# EAGLE board Combined_cc2530+breakout (EAGLE 7.1.0)
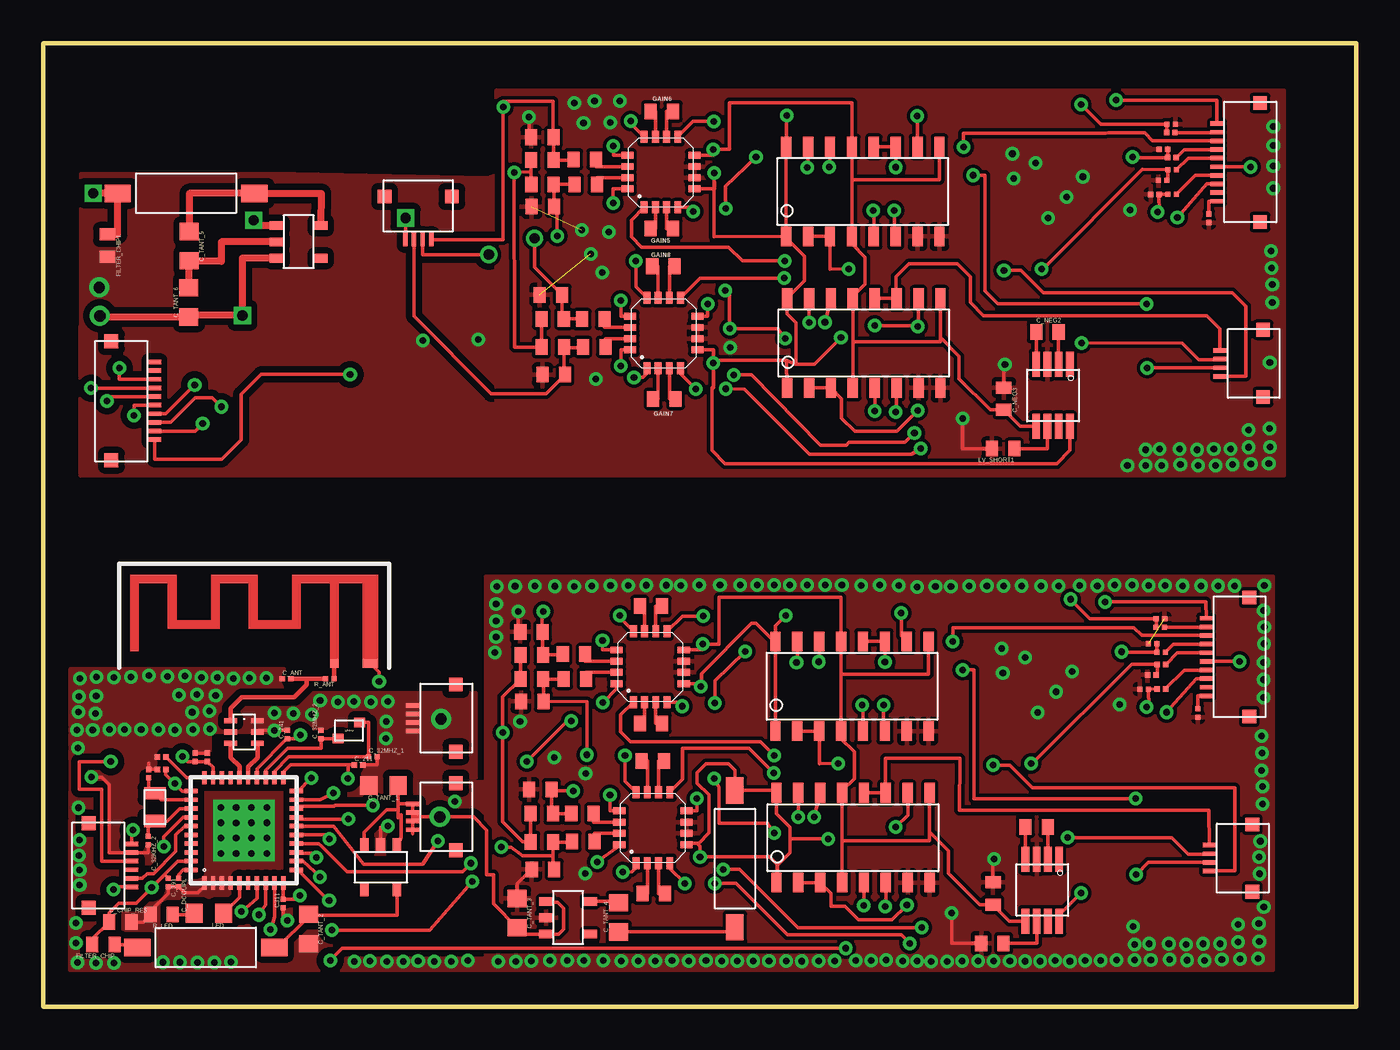
[diagram p0: board, top side]
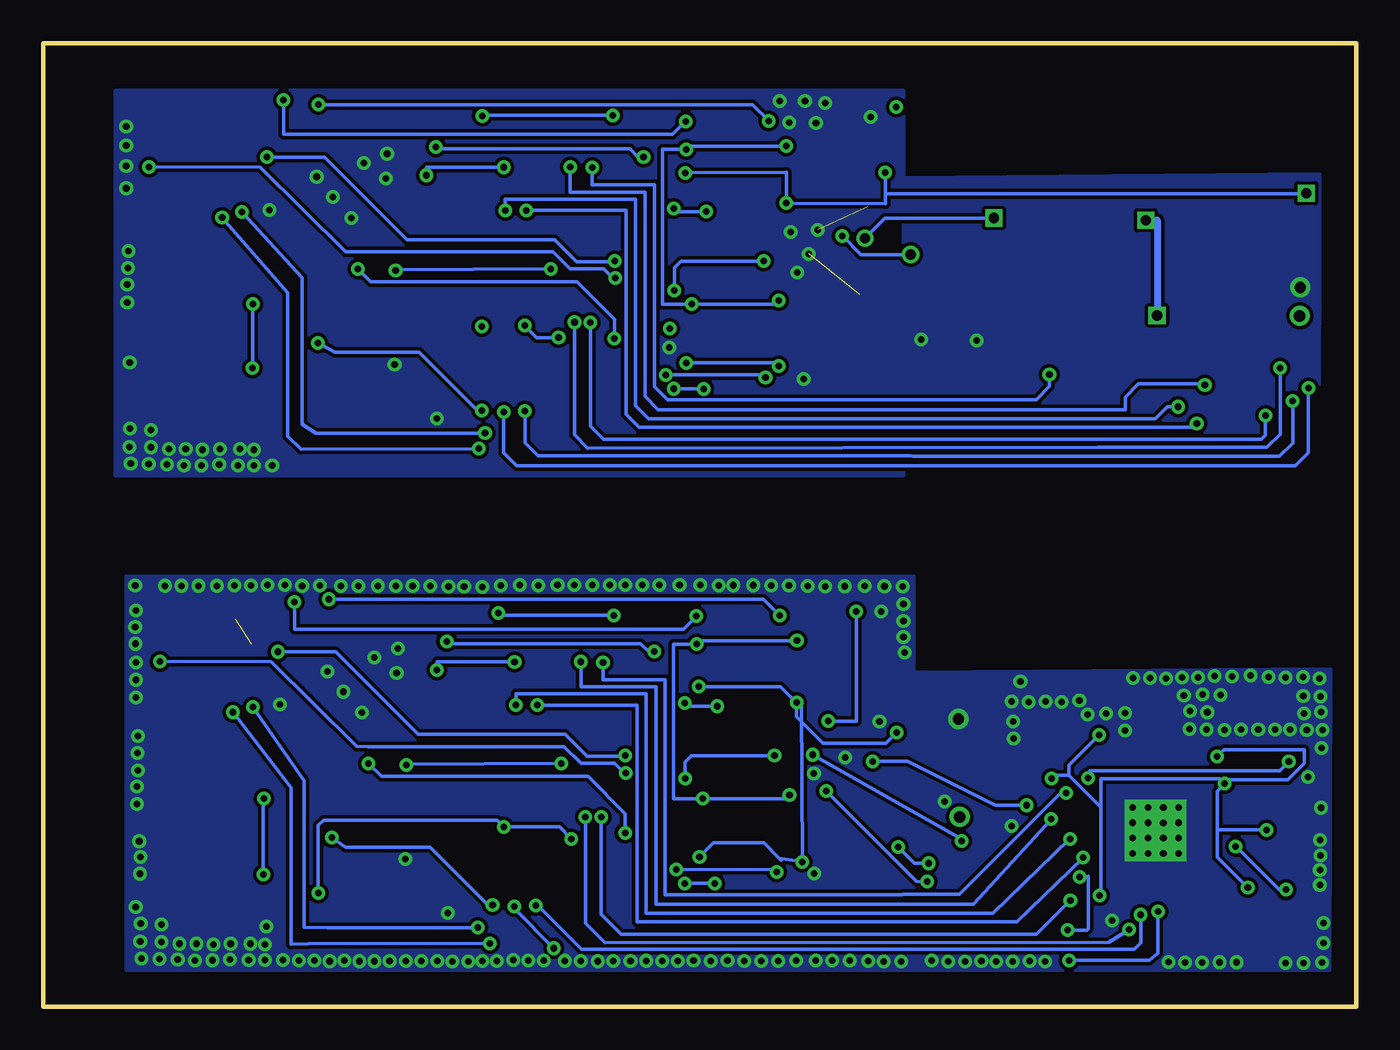
[diagram p1: board, bottom side, seen from below]

Size 76.2 x 55.88 mm. Coordinates in mm from the lower left corner, seen from the top.
Outline: 0,0 0,55.88 76.2,55.88 76.2,0 0,0
Copper layers (1*16): Top 0.035mm / dielectric 1.5mm / Bottom 0.035mm
Design rules "default": minimum track width 10mil, minimum drill 24mil, track to track 8mil, track to pad 8mil, pad to pad 8mil, via to via 8mil, smd to smd 8mil, copper to edge 40mil, drill to drill 8mil, minimum pad ring 10mil, minimum via ring 8mil, stop-mask expansion 4mil, vias tented up to drill 0mil, thermal gap 10mil

## Footprints (pad centres in the part's own frame; a part is rotated, then mirrored left to right if it is on the bottom)
X32.768KHZ = smd 1.25 x 0.7: Q1 0.009,-0.811; Q2 0.009,0.789
0201_R/L/C = smd 0.3 x 0.3: 1 -0.245,-0.001; 2 0.245,-0.001
0402_R/L/C = smd 0.7 x 0.9: 1 -0.65,0.001; 2 0.65,0.001
0603_R/L/C = smd 1 x 1.1: 1 -0.85,0; 2 0.85,0
FFC4POS = smd 0.762 x 0.254: 1 0.04,0.742; 2 0.04,0.242; 3 0.04,-0.258; 4 0.04,-0.758 | smd 0.8 x 0.8: P$5 -2.46,1.94; P$6 -2.46,-1.96
QFN-16 = smd 0.7 x 0.4: -IN1 -2.05,0.975; -IN2 2.05,0.975; IN1 -2.05,-0.975; IN2 2.05,-0.975; RG1 -2.05,0.325; RG1_1 -2.05,-0.325; RG2 2.05,0.325; RG2_1 2.05,-0.325 | smd 0.4 x 0.7: -VS 0.975,1.95; -VS_B 0.975,-1.95; OUT1 -0.325,1.95; OUT2 0.325,1.95; REF1 -0.325,-1.95; REF2 0.325,-1.95; VS -0.975,1.95; VS_B -0.975,-1.95
ANTENNA = smd 0.5 x 0.5: A 0,0 | smd 0.5 x 0.9: GND 0,-2.1
CC2530 = smd 0.762 x 0.254: AVDD1 3.048,1.27; AVDD2 3.048,0.762; AVDD3 3.048,-0.762; AVDD4 3.048,1.778; AVDD5 3.048,-2.286; DVDD2 -3.048,-2.286; GND1 -3.048,2.286; GND2 -3.048,1.778; GND3 -3.048,1.27; GND4 -3.048,0.762; P1_1 -3.048,-1.778; P1_2 -3.048,-1.27; P1_3 -3.048,-0.762; P1_4 -3.048,-0.254; P1_5 -3.048,0.254; RBIAS 3.048,2.286; RF_N 3.048,0.254; RF_P 3.048,-0.254; XOSC_Q1 3.048,-1.778; XOSC_Q2 3.048,-1.27 | smd 0.254 x 0.762: AVDD6 2.286,3.048; DCOUPL -2.286,3.048; DVDD1 -1.778,3.048; P0_0 1.778,-3.048; P0_1 1.27,-3.048; P0_2 0.762,-3.048; P0_3 0.254,-3.048; P0_4 -0.254,-3.048; P0_5 -0.762,-3.048; P0_6 -1.27,-3.048; P0_7 -1.778,-3.048; P1_0 -2.286,-3.048; P1_6 -1.27,3.048; P1_7 -0.762,3.048; P2_0 -0.254,3.048; P2_1 0.254,3.048; P2_2 0.762,3.048; P2_3/XOSC32K_Q2 1.27,3.048; P2_4/XOSC32K_Q1 1.778,3.048; RESET_N 2.286,-3.048 | smd 3.56 x 3.56: GND0 0,0 | drill 0.381 square: GND001 -1.335,1.335; GND002 -0.445,1.335; GND003 0.445,1.335; GND004 1.335,1.335; GND005 -1.335,0.445; GND006 -0.445,0.445; GND007 0.44,0.445; GND008 1.335,0.445; GND009 -1.335,-0.445; GND010 -0.445,-0.445; GND011 0.445,-0.445; GND012 1.335,-0.445; GND013 -1.335,-1.335; GND014 -0.445,-1.335; GND015 0.445,-1.335; GND016 1.335,-1.335
BALUN = smd 0.75 x 0.3: BALANCED3 -0.782,-0.655; BALANCED4 0.768,-0.655; GND2 -0.782,-0.005; GND5 0.768,-0.005; GND6 0.768,0.645; UNBALANCED -0.782,0.645
X32MHZ = smd 0.55 x 0.65: Q1 0.496,-0.576; Q2 -0.454,0.674
S-PDSO-G8 = smd 0.45 x 1.45: 1 -0.975,-1.8; 2 -0.325,-1.8; 3 0.325,-1.8; 4 0.975,-1.8; 5 0.975,1.8; 6 0.325,1.8; 7 -0.325,1.8; 8 -0.975,1.8
SOIC-16-ON-SEMI = smd 0.6 x 1.15: 1 -4.445,-2.6; 2 -3.175,-2.6; 3 -1.905,-2.6; 4 -0.635,-2.6; 5 0.635,-2.6; 6 1.905,-2.6; 7 3.175,-2.6; 8 4.445,-2.6; 9 4.445,2.6; 10 3.175,2.6; 11 1.905,2.6; 12 0.635,2.6; 13 -0.635,2.6; 14 -1.905,2.6; 15 -3.175,2.6; 16 -4.445,2.6
FFC10POS = smd 0.762 x 0.254: 1 -0.015,2.271; 2 -0.015,1.771; 3 -0.015,1.271; 4 -0.015,0.771; 5 -0.015,0.271; 6 -0.015,-0.229; 7 -0.015,-0.729; 8 -0.015,-1.229; 9 -0.015,-1.729; 10 -0.015,-2.229 | smd 0.8 x 0.8: P$11 -2.52,3.47; P$12 -2.52,-3.43
REGULATOR = smd 0.5 x 0.8: 1 0.94,1.275; 2 0,1.275; 3 -0.95,1.275; 4 -0.95,-1.275; 5 0.95,-1.275
SWITCH_MANUAL = smd 1.524 x 1.016: 1 -4.13,0; 2 3.81,0
FFC6POS = smd 0.762 x 0.254: 1 0.008,1.269; 2 0.008,0.769; 3 0.008,0.269; 4 0.008,-0.231; 5 0.008,-0.731; 6 0.008,-1.231 | smd 0.8 x 0.8: P$7 -2.49,2.47; P$8 -2.49,-2.43
DRILL_CONNECT = drill 0.66 pad 1.016: 1 0,0

## Placement (x,y rotation side)
32KHZ  X32.768KHZ  [X32.768KHZ]  6.5,11.55 180 top
C311  100nF  [0201_R/L/C]  13.93,5.98 90 top
C_32KHZ_1  15pF  [0201_R/L/C]  6.13,13.51 90 top
C_32KHZ_2  15pF  [0201_R/L/C]  6.11,9.63 270 top
C_32MHZ_1  20pF  [0201_R/L/C]  19.14,14.49 0 top
C_32MHZ_2  20pF  [0201_R/L/C]  16.12,15.78 90 top
C_101  100nF  [0201_R/L/C]  6.88,13.75 0 top
C_211  100nF  [0201_R/L/C]  18.31,14.01 0 top
C_241  100nF  [0201_R/L/C]  14.17,15.77 90 top
C_271  100nF  [0201_R/L/C]  9.53,14.46 270 top
C_272  220pF  [0201_R/L/C]  8.82,14.46 270 top
C_391  1uF  [0201_R/L/C]  7.25,7.2 270 top
C_ANT  0.5pF  [0201_R/L/C]  14.13,19 0 top
C_CHIP_RES  2.2uF  [0402_R/L/C]  4.48,4.9 0 top
C_DCOUPL  0.47uF  [0201_R/L/C]  7.86,7.2 270 top
C_NEG  10uF  [0402_R/L/C]  57.65,10.42 0 top
C_NEG1  10uF  [0402_R/L/C]  55.11,6.56 270 top
C_NEG2  10uF  [0402_R/L/C]  58.27,39.11 0 top
C_NEG3  10uF  [0402_R/L/C]  55.74,35.25 270 top
C_TANT_1  1uF  [0603_R/L/C]  19.75,12.82 180 top
C_TANT_2  2.2uF  [0603_R/L/C]  15.4,4.5 270 top
C_TANT_3  1uF  [0603_R/L/C]  27.51,5.42 270 top
C_TANT_4  2.2uF  [0603_R/L/C]  33.39,5.18 90 top
C_TANT_5  2.2uF  [0603_R/L/C]  8.49,44.11 270 top
C_TANT_6  1uF  [0603_R/L/C]  8.46,40.84 90 top
DC  0  [0402_R/L/C]  28.35,18.99 180 top
DC1  0  [0402_R/L/C]  28.35,20.4 180 top
DC2  0  [0402_R/L/C]  28.38,17.7 0 top
DC3  0  [0402_R/L/C]  28.34,21.73 0 top
DC4  0  [0402_R/L/C]  28.94,9.56 180 top
DC5  0  [0402_R/L/C]  29,7.96 0 top
DC6  0  [0402_R/L/C]  28.94,11.19 180 top
DC7  0  [0402_R/L/C]  28.84,12.59 0 top
DC8  0  [0402_R/L/C]  28.98,47.68 180 top
DC9  0  [0402_R/L/C]  29,46.39 0 top
DC10  0  [0402_R/L/C]  28.97,49.09 180 top
DC11  0  [0402_R/L/C]  28.96,50.42 0 top
DC12  0  [0402_R/L/C]  29.57,38.24 180 top
DC13  0  [0402_R/L/C]  29.63,36.65 0 top
DC14  0  [0402_R/L/C]  29.56,39.88 180 top
DC15  0  [0402_R/L/C]  29.46,41.28 0 top
DC_OFFSET1  10uF  [0402_R/L/C]  30.86,19 180 top
DC_OFFSET2  10uF  [0402_R/L/C]  30.8,20.44 180 top
DC_OFFSET3  10uF  [0402_R/L/C]  31.35,9.58 180 top
DC_OFFSET4  10uF  [0402_R/L/C]  31.3,11.19 180 top
DC_OFFSET5  10uF  [0402_R/L/C]  31.48,47.69 180 top
DC_OFFSET6  10uF  [0402_R/L/C]  31.43,49.13 180 top
DC_OFFSET7  10uF  [0402_R/L/C]  31.98,38.27 180 top
DC_OFFSET8  10uF  [0402_R/L/C]  31.92,39.88 180 top
FILTER_CHIP  L_1k  [0402_R/L/C]  3.51,3.59 180 top
FILTER_CHIP1  L_1k  [0402_R/L/C]  3.73,44.14 270 top
GAIN1  0  [0402_R/L/C]  35.27,16.43 180 top
GAIN2  0  [0402_R/L/C]  35.27,23.23 180 top
GAIN3  0  [0402_R/L/C]  35.43,6.55 180 top
GAIN4  0  [0402_R/L/C]  35.37,14.25 180 top
GAIN5  0  [0402_R/L/C]  35.9,45.12 180 top
GAIN6  0  [0402_R/L/C]  35.9,51.92 180 top
GAIN7  0  [0402_R/L/C]  36.05,35.24 180 top
GAIN8  0  [0402_R/L/C]  36,42.94 180 top
GND_IN  FFC4POS  [FFC4POS]  21.49,16.71 180 top
IC1  AD8222_NEW  [QFN-16]  35.22,19.71 90 top
IC2  AD8222_NEW  [QFN-16]  35.38,10.37 90 top
IC3  AD8222_NEW  [QFN-16]  35.85,48.4 90 top
IC4  AD8222_NEW  [QFN-16]  36.01,39.06 90 top
IN_CHOOSE  0  [0201_R/L/C]  64.88,19.84 180 top
IN_CHOOSE1  0  [0201_R/L/C]  64.88,18.42 180 top
IN_CHOOSE2  0  [0201_R/L/C]  64.8,22 180 top
IN_CHOOSE3  0  [0201_R/L/C]  64.87,20.55 180 top
IN_CHOOSE4  0  [0201_R/L/C]  64.33,19.24 0 top
IN_CHOOSE5  0  [0201_R/L/C]  63.88,18.41 180 top
IN_CHOOSE6  0  [0201_R/L/C]  64.82,22.49 0 top
IN_CHOOSE7  0  [0201_R/L/C]  64.37,21.04 180 top
IN_CHOOSE8  0  [0201_R/L/C]  65.51,48.53 180 top
IN_CHOOSE9  0  [0201_R/L/C]  67.01,17.03 270 top
IN_CHOOSE10  0  [0201_R/L/C]  65.51,47.11 180 top
IN_CHOOSE11  0  [0201_R/L/C]  65.43,50.69 180 top
IN_CHOOSE12  0  [0201_R/L/C]  65.49,49.24 180 top
IN_CHOOSE13  0  [0201_R/L/C]  64.95,47.92 0 top
IN_CHOOSE14  0  [0201_R/L/C]  64.51,47.1 180 top
IN_CHOOSE15  0  [0201_R/L/C]  65.45,51.18 0 top
IN_CHOOSE16  0  [0201_R/L/C]  65,49.73 180 top
IN_CHOOSE17  0  [0201_R/L/C]  67.63,45.72 270 top
INVERTED_F-ANTENNA  ANTENNA  [ANTENNA]  16.89,19.89 90 top
LED  [0603_R/L/C]  9.62,5.42 180 top
LV_SHORT  0  [0402_R/L/C]  55.08,3.67 180 top
LV_SHORT1  0  [0402_R/L/C]  55.7,32.36 180 top
R_ANT  0.0  [0201_R/L/C]  16.65,19 180 top
R_BIAS  56k  [0201_R/L/C]  6.88,14.48 180 top
R_LED  1k  [0402_R/L/C]  6.88,5.33 180 top
U$1  [CC2530]  11.65,10.21 90 top
U$2  BALUN  [BALUN]  11.67,15.93 0 top
U$3  X32MHZ  [X32MHZ]  17.8,15.99 90 top
U$4  TL7660  [S-PDSO-G8]  57.97,6.76 180 top
U$5  MC74HC4316A  [SOIC-16-ON-SEMI]  46.94,18.58 0 top
U$6  MC74HC4316A  [SOIC-16-ON-SEMI]  46.99,9.79 0 top
U$7  FFC10POS  [FFC10POS]  67.47,20.29 180 top
U$8  REGULATOR  [REGULATOR]  30.46,5.15 90 top
U$9  SWITCH_MANUAL  [SWITCH_MANUAL]  40.14,8.72 90 top
U$10  REGULATOR  [REGULATOR]  19.58,8.08 0 top
U$11  REGULATOR  [REGULATOR]  14.83,44.35 90 top
U$12  SWITCH_MANUAL  [SWITCH_MANUAL]  8.14,47.17 180 top
U$13  TL7660  [S-PDSO-G8]  58.6,35.45 180 top
U$14  MC74HC4316A  [SOIC-16-ON-SEMI]  47.56,47.27 0 top
U$15  MC74HC4316A  [SOIC-16-ON-SEMI]  47.62,38.48 0 top
U$16  FFC4POS  [FFC4POS]  68.33,37.29 180 top
U$17  FFC6POS  [FFC6POS]  5.14,8.17 0 top
U$18  SWITCH_MANUAL  [SWITCH_MANUAL]  9.29,3.43 180 top
U$19  FFC10POS  [FFC10POS]  68.09,48.98 180 top
U$20  FFC10POS  [FFC10POS]  6.48,35.11 0 top
U$21  FFC4POS  [FFC4POS]  21.78,44.53 270 top
U$28  FFC4POS  [FFC4POS]  67.7,8.6 180 top
V+_IN  FFC4POS  [FFC4POS]  21.49,11 180 top
WIRE+  DRILL_CONNECT  [DRILL_CONNECT]  23.02,11 90 top
WIRE+1  DRILL_CONNECT  [DRILL_CONNECT]  3.29,40.06 90 top
WIRE-  DRILL_CONNECT  [DRILL_CONNECT]  23.09,16.68 90 top
WIRE-1  DRILL_CONNECT  [DRILL_CONNECT]  3.26,41.71 90 top

## Library data of the parts
32KHZ C311 C_32KHZ_1 C_32KHZ_2 C_32MHZ_1 C_32MHZ_2 C_101 C_211 C_241 C_271 C_272 C_391 C_ANT C_CHIP_RES C_DCOUPL C_NEG C_NEG1-C_NEG3 C_TANT_1-C_TANT_6 DC DC1-DC15 DC_OFFSET1-DC_OFFSET8 FILTER_CHIP FILTER_CHIP1 GAIN1-GAIN8 GND_IN IN_CHOOSE IN_CHOOSE1-IN_CHOOSE17 INVERTED_F-ANTENNA LED LV_SHORT LV_SHORT1 R_ANT R_BIAS R_LED U$1 U$2 U$7-U$12 U$16-U$21 U$28 V+_IN WIRE+ WIRE+1 WIRE- WIRE-1 = CC2530_PCB_TL
IC1-IC4 U$4-U$6 U$13-U$15 = moth
U$3 = CC2530_PCB_TL; X: 32MHz

## Nets
DCOUPL1: C_DCOUPL.1 U$1.DCOUPL
EMG1: DC1.1 DC3.2 DC_OFFSET2.2 U$1.P0_1
EMG1_A: IC1.-IN2 IN_CHOOSE2.2 IN_CHOOSE6.1
EMG1_A1: IC3.-IN2 IN_CHOOSE11.2 IN_CHOOSE15.1
EMG1_IN: IC1.IN2 U$7.10
EMG1_IN1: IC3.IN2 U$19.10
EMG1_SEL: IN_CHOOSE2.1 U$7.9
EMG1_SEL1: IN_CHOOSE11.1 U$19.9
EMG2: DC2.2 DC.1 DC_OFFSET1.2 U$1.P0_3
EMG2_A: IC1.-IN1 IN_CHOOSE3.2 IN_CHOOSE7.1
EMG2_A1: IC3.-IN1 IN_CHOOSE12.2 IN_CHOOSE16.1
EMG2_IN: IC1.IN1 U$7.8
EMG2_IN1: IC3.IN1 U$19.8
EMG2_SEL: IN_CHOOSE3.1 U$7.7
EMG2_SEL1: IN_CHOOSE12.1 U$19.7
EMG3: DC4.1 DC5.2 DC_OFFSET3.2 U$1.P0_5
EMG3_A: IC2.-IN1 IN_CHOOSE1.2 IN_CHOOSE5.1
EMG3_A1: IC4.-IN1 IN_CHOOSE10.2 IN_CHOOSE14.1
EMG3_IN: IC2.IN1 U$7.3
EMG3_IN1: IC4.IN1 U$19.3
EMG3_SEL: IN_CHOOSE1.1 U$7.4
EMG3_SEL1: IN_CHOOSE10.1 U$19.4
EMG4: DC6.1 DC7.2 DC_OFFSET4.2 U$1.P0_7
EMG4_A: IC2.-IN2 IN_CHOOSE4.2 IN_CHOOSE.2
EMG4_A1: IC4.-IN2 IN_CHOOSE8.2 IN_CHOOSE13.2
EMG4_IN: IC2.IN2 U$7.5
EMG4_IN1: IC4.IN2 U$19.5
EMG4_SEL: IN_CHOOSE.1 U$7.6
EMG4_SEL1: IN_CHOOSE8.1 U$19.6
EMG5: DC10.1 DC11.2 DC_OFFSET6.2 U$21.1
EMG6: DC8.1 DC9.2 DC_OFFSET5.2 U$21.2
EMG7: DC12.1 DC13.2 DC_OFFSET7.2 U$21.3
EMG8: DC14.1 DC15.2 DC_OFFSET8.2 U$21.4
GND: C311.1 C_32KHZ_1.2 C_32KHZ_2.2 C_32MHZ_1.2 C_32MHZ_2.2 C_101.1 C_211.2 C_241.2 C_271.1 C_272.1 C_391.2 C_ANT.1 C_CHIP_RES.2 C_DCOUPL.2 C_NEG1.1 C_TANT_1.2 C_TANT_2.2 C_TANT_3.1 DC2.1 DC3.1 DC5.1 DC7.1 GND_IN.1 GND_IN.2 GND_IN.3 GND_IN.4 IC1.REF1 IC1.REF2 IC2.REF1 IC2.REF2 IN_CHOOSE4.1 IN_CHOOSE5.2 IN_CHOOSE6.2 IN_CHOOSE7.2 IN_CHOOSE9.2 INVERTED_F-ANTENNA.GND LV_SHORT.2 R_BIAS.2 R_LED.2 U$1.GND0 U$1.GND001 U$1.GND1 U$1.GND2 U$1.GND002 U$1.GND003 U$1.GND3 U$1.GND4 U$1.GND004 U$1.GND005 U$1.GND006 U$1.GND007 U$1.GND008 U$1.GND009 U$1.GND010 U$1.GND011 U$1.GND012 U$1.GND013 U$1.GND014 U$1.GND015 U$1.GND016 U$2.GND2 U$2.GND5 U$2.GND6 U$4.3 U$5.7 U$5.8 U$6.7 U$6.8 U$8.2 U$10.2 U$17.2 WIRE-.1
GND1: C_NEG3.1 DC9.1 DC11.1 DC13.1 DC15.1 FILTER_CHIP1.2 IC3.REF1 IC3.REF2 IC4.REF1 IC4.REF2 IN_CHOOSE13.1 IN_CHOOSE14.2 IN_CHOOSE15.2 IN_CHOOSE16.2 IN_CHOOSE17.2 LV_SHORT1.2 U$13.3 U$14.7 U$14.8 U$15.7 U$15.8 WIRE-1.1
LED/P1_5: LED.1 U$1.P1_5
N$1: C_ANT.2 R_ANT.2 U$2.UNBALANCED
N$2: INVERTED_F-ANTENNA.A R_ANT.1
N$3: C_NEG.2 U$4.2
N$4: C_NEG.1 U$4.4
N$5: LV_SHORT.1 U$4.6
N$6: GAIN1.2 IC1.RG1
N$7: GAIN1.1 IC1.RG1_1
N$8: GAIN2.2 IC1.RG2
N$9: GAIN2.1 IC1.RG2_1
N$10: GAIN3.2 IC2.RG1
N$11: GAIN3.1 IC2.RG1_1
N$12: GAIN4.2 IC2.RG2
N$13: GAIN4.1 IC2.RG2_1
N$14: DC_OFFSET1.1 IC1.OUT1
N$15: DC_OFFSET2.1 IC1.OUT2
N$16: DC_OFFSET4.1 IC2.OUT2
N$17: DC_OFFSET3.1 IC2.OUT1
N$18: C_TANT_4.2 U$8.5
N$19: C_TANT_4.1 U$9.1
N$20: C_TANT_5.1 U$11.5 U$12.1
N$21: C_TANT_2.1 U$10.5 U$18.1
N$22: C_NEG2.2 U$13.2
N$23: C_NEG2.1 U$13.4
N$24: LV_SHORT1.1 U$13.6
N$25: GAIN5.2 IC3.RG1
N$26: GAIN5.1 IC3.RG1_1
N$27: GAIN6.2 IC3.RG2
N$28: IN_CHOOSE9.1 U$7.1
N$29: GAIN6.1 IC3.RG2_1
N$30: GAIN7.2 IC4.RG1
N$31: GAIN7.1 IC4.RG1_1
N$32: GAIN8.2 IC4.RG2
N$33: GAIN8.1 IC4.RG2_1
N$34: LED.2 R_LED.1
N$35: DC_OFFSET5.1 IC3.OUT1
N$36: DC_OFFSET6.1 IC3.OUT2
N$37: DC_OFFSET8.1 IC4.OUT2
N$38: DC_OFFSET7.1 IC4.OUT1
N$39: IN_CHOOSE17.1 U$19.1
N$40: C_TANT_5.2 C_TANT_6.2 U$11.2
N$41: U$20.2
N$42: U$20.1
NC: U$4.1
NC1: U$13.1
NEG_STIM1: U$1.P0_6 U$5.5
NEG_STIM2: U$1.P0_2 U$5.14
NEG_STIM3: U$1.P1_2 U$6.5
NEG_STIM4: U$1.P1_1 U$6.14
NEG_STIM5: U$14.14 U$20.7
NEG_STIM6: U$14.5 U$20.9
NEG_STIM7: U$15.14 U$20.3
NEG_STIM8: U$15.5 U$20.5
OSC: U$4.7
OSC1: U$13.7
P2_1: U$1.P2_1 U$17.5
P2_2: U$1.P2_2 U$17.6
P2_3/X32K_Q2: 32KHZ.Q2 C_32KHZ_2.1 U$1.P2_3/XOSC32K_Q2
P2_4/X32K_Q1: 32KHZ.Q1 C_32KHZ_1.1 U$1.P2_4/XOSC32K_Q1
POS_STIM1: U$1.P0_0 U$5.15
POS_STIM2: U$1.P0_4 U$5.6
POS_STIM3: U$1.P1_0 U$6.15
POS_STIM4: U$1.P1_3 U$6.6
POS_STIM5: U$14.15 U$20.10
POS_STIM6: U$15.15 U$20.6
POS_STIM7: U$14.6 U$20.8
POS_STIM8: U$15.6 U$20.4
RBIAS: R_BIAS.1 U$1.RBIAS
RESET: U$1.RESET_N U$17.3
RF_N: U$1.RF_N U$2.BALANCED3
RF_P: U$1.RF_P U$2.BALANCED4
STIM1: U$5.2 U$5.3 U$28.1
STIM2: U$5.11 U$5.12 U$28.2
STIM3: U$6.2 U$6.3 U$28.3
STIM4: U$6.11 U$6.12 U$28.4
STIM5: U$14.11 U$14.12 U$16.2
STIM6: U$14.2 U$14.3 U$16.1
STIM7: U$15.11 U$15.12 U$16.4
STIM8: U$15.2 U$15.3 U$16.3
SWITCH_OUT: FILTER_CHIP.1 U$18.2
V+: C_TANT_1.1 C_TANT_3.2 U$8.1 U$8.3 U$10.1 U$10.3 V+_IN.1 V+_IN.2 V+_IN.3 V+_IN.4 WIRE+.1
V+1: C_TANT_6.1 U$11.1 U$11.3 WIRE+1.1
VDD: C311.2 C_101.2 C_211.1 C_241.1 C_271.2 C_272.2 C_391.1 C_CHIP_RES.1 FILTER_CHIP.2 U$1.AVDD1 U$1.AVDD2 U$1.AVDD3 U$1.AVDD4 U$1.AVDD5 U$1.AVDD6 U$1.DVDD1 U$1.DVDD2 U$17.1
VDD1: DC8.2 DC10.2 DC12.2 DC14.2 FILTER_CHIP1.1 IC3.VS IC3.VS_B IC4.VS IC4.VS_B U$12.2 U$13.8 U$14.1 U$14.10 U$14.16 U$15.1 U$15.10 U$15.16
VDD2: DC1.2 DC4.2 DC6.2 DC.2 IC1.VS IC1.VS_B IC2.VS IC2.VS_B U$4.8 U$5.1 U$5.10 U$5.16 U$6.1 U$6.10 U$6.16 U$9.2
VEE: C_NEG1.2 IC1.-VS IC1.-VS_B IC2.-VS IC2.-VS_B U$4.5 U$5.4 U$5.9 U$5.13 U$6.4 U$6.9 U$6.13
VEE1: C_NEG3.2 IC3.-VS IC3.-VS_B IC4.-VS IC4.-VS_B U$13.5 U$14.4 U$14.9 U$14.13 U$15.4 U$15.9 U$15.13
X32M_Q1: C_32MHZ_1.1 U$1.XOSC_Q1 U$3.Q1
X32M_Q2: C_32MHZ_2.1 U$1.XOSC_Q2 U$3.Q2

## Tracks (layer width: path | path; a pad name or v marks a point on that pad's centre or on a via)
DCOUPL1
  Top 0.203: U$1.DCOUPL | U$1.DCOUPL 8.13,7.93 7.86,7.66 C_DCOUPL.1
EMG1  (via drill 0.38)
  Top 0.203: 19.02,11.49 v19.13,11.68 16.95,11.68 16.89,11.61 14.82,11.61 U$1.P0_1 | DC_OFFSET2.2 30.11,20.4 DC1.1 DC3.2 28.96,21.76 28.96,22.91 v29.02,22.91 | v30.64,16.56 30.41,16.56 v28.07,14.22
  Bottom 0.203: v19.13,11.68 20.94,11.67 26.06,14.22 v28.07,14.22 | v29.02,22.91 29.02,16.56 v30.64,16.56
EMG1_A  (via drill 0.38)
  Top 0.203: IN_CHOOSE2.2 64.58,22.02 IN_CHOOSE6.1 60.75,22.49 v59.61,23.62 | IC1.-IN2 33.46,22.54 v33.46,22.68
  Bottom 0.203: v33.46,22.68 34.4,23.62 v59.61,23.62
EMG1_A1  (via drill 0.38)
  Top 0.203: IN_CHOOSE11.2 65.2,50.71 IN_CHOOSE15.1 61.37,51.18 v60.24,52.31 | IC3.-IN2 34.09,51.23 v34.09,51.37
  Bottom 0.203: v34.09,51.37 35.03,52.31 v60.24,52.31
EMG1_IN  (via drill 0.38)
  Top 0.203: IC1.IN2 37.09,22.65 v38.29,22.65 | U$7.10 67.47,23.47 v61.63,23.47
  Bottom 0.203: v38.29,22.65 39.05,21.89 61.61,21.89 61.61,22.62 v61.63,23.47
EMG1_IN1  (via drill 0.38)
  Top 0.203: IC3.IN2 37.71,51.34 v38.92,51.34 | U$19.10 68.1,52.58 v62.25,52.58
  Bottom 0.203: v38.92,51.34 39.67,50.58 62.23,50.58 62.23,51.3 v62.25,52.58
EMG1_SEL
  Top 0.203: U$7.9 67.47,22 IN_CHOOSE2.1
EMG1_SEL1
  Top 0.203: U$19.9 68.09,50.69 IN_CHOOSE11.1
EMG2  (via drill 0.38)
  Top 0.203: U$1.P0_3 16.85,10.47 18.6,8.26 22.01,8.26 v22.89,9.59 | v31.55,14.61 31.55,17.68 DC2.2 29.03,18.96 DC.1 30.2,18.99 DC_OFFSET1.2
  Bottom 0.203: v22.89,9.59 22.89,9.7 v31.55,14.61
EMG2_A  (via drill 0.38)
  Top 0.203: IC1.-IN1 33.5,16.91 33.5,15.95 34.09,15.36 41.62,15.36 v42.41,14.56 | IN_CHOOSE7.1 64.62,21.12 IN_CHOOSE3.2 62.6,20.55 v62.58,20.58
  Bottom 0.203: v42.41,14.56 42.46,14.52 44.63,14.52 45.91,15.8 54.45,15.8 59.23,20.58 v62.58,20.58
EMG2_A1  (via drill 0.38)
  Top 0.203: IC3.-IN1 34.13,45.6 34.13,44.64 34.71,44.05 39.77,44.05 40.57,43.25 v43.04,43.25 | IN_CHOOSE16.1 65.25,49.81 IN_CHOOSE12.2 63.23,49.24 v63.2,49.27
  Bottom 0.203: v43.04,43.25 43.08,43.21 45.26,43.21 46.53,44.49 55.08,44.49 59.86,49.27 v63.2,49.27
EMG2_IN  (via drill 0.38)
  Top 0.203: U$7.8 67.48,21.53 63.75,21.53 63.29,21.98 61.17,21.98 61,21.96 52.79,21.97 v52.79,21.17 | v40.74,20.58 38.98,18.9 v38.98,17.6 | v37.1,17.42 36.86,17.66 IC1.IN1
  Bottom 0.203: v52.79,21.17 52.68,21.06 41.52,21.06 41.05,20.58 v40.74,20.58 | v38.98,17.6 38.84,17.42 v37.1,17.42
EMG2_IN1  (via drill 0.38)
  Top 0.203: U$19.8 64.37,50.22 63.91,50.67 61.8,50.67 61.63,50.65 53.41,50.66 v53.41,49.85 | v41.36,49.27 39.6,47.59 v39.6,46.29 | v37.72,46.11 37.48,46.35 IC3.IN1
  Bottom 0.203: v53.41,49.85 53.3,49.75 42.15,49.75 41.67,49.27 v41.36,49.27 | v39.6,46.29 39.47,46.11 v37.72,46.11
EMG2_SEL
  Top 0.203: IN_CHOOSE3.1 65.58,21.02 U$7.7
EMG2_SEL1
  Top 0.203: IN_CHOOSE12.1 66.2,49.71 U$19.7
EMG3  (via drill 0.38)
  Top 0.203: DC_OFFSET3.2 30.7,9.53 29.7,9.53 29.7,9.55 DC4.1 29.59,8.58 | DC5.2 29.59,7.96 29.59,8.58 | U$1.P0_5 16,9.45 16.15,9.3 17.63,7.82 24.33,7.82 v24.82,8.31 | v26.58,9.24 27.15,9.24 27.83,8.75 29.6,8.75 29.59,8.58
  Bottom 0.203: v24.82,8.31 25.65,8.31 v26.58,9.24
EMG3_A  (via drill 0.38)
  Top 0.203: IN_CHOOSE1.2 IN_CHOOSE5.1 64.14,17.38 v64.04,17.38 | IC2.-IN1 34.41,8.04 34.18,7.81 v33.63,7.79 | v50.98,4.58 43.79,4.58 40.39,7.98 39.48,7.98 v39.46,7.95
  Bottom 0.203: v33.63,7.79 33.82,7.96 v39.46,7.95 | v50.98,4.58 59.72,4.58 61.06,4.59 61.06,13.08 v64.04,17.38
EMG3_A1  (via drill 0.38)
  Top 0.203: IN_CHOOSE10.2 IN_CHOOSE14.1 64.77,46.07 v64.66,46.07 | IC4.-IN1 35.03,36.73 34.8,36.5 v34.29,36.5 | v40.08,36.64 41.12,36.65 45.09,32.56 46.61,32.56 46.76,32.72 50.01,32.72 v50.56,33.26
  Bottom 0.203: v34.29,36.5 34.44,36.65 v40.08,36.64 | v50.56,33.26 60.35,33.26 61.16,33.78 61.16,42.28 v64.66,46.07
EMG3_IN  (via drill 0.38)
  Top 0.203: IC2.IN1 36.36,8.02 v37.24,7.14 | v65.18,17.07 66.9,19.02 U$7.3 | v38.98,7.14 40.2,7.14 43.18,4.16 49.79,4.16 v50.29,3.67
  Bottom 0.203: v37.24,7.14 39.23,7.14 v38.98,7.14 | v50.29,3.67 60.82,3.63 61.81,3.63 61.81,12.7 v65.18,17.07
EMG3_IN1  (via drill 0.38)
  Top 0.203: IC4.IN1 36.98,36.71 v37.87,35.83 | v39.6,35.83 40.69,35.8 44.45,32.03 50.38,32.03 v50.91,32.36 | v65.81,45.76 67.53,47.71 U$19.3
  Bottom 0.203: v37.87,35.83 39.85,35.83 v39.6,35.83 | v50.91,32.36 61.23,32.33 62,33.09 62,41.41 v65.81,45.76
EMG3_SEL
  Top 0.203: IN_CHOOSE1.1 66.22,19.52 U$7.4
EMG3_SEL1
  Top 0.203: IN_CHOOSE10.1 66.85,48.21 U$19.4
EMG4  (via drill 0.38)
  Top 0.203: DC_OFFSET4.2 DC6.1 29.49,11.19 DC7.2 29.57,12.51 v30.76,12.51 | U$1.P0_7 15.1,8.44 v16.07,7.52 | v16.75,4.43 22.41,4.43 v24.9,7.25
  Bottom 0.203: v16.07,7.52 15.56,7.54 15.56,4.51 15.64,4.43 v16.75,4.43 | v24.9,7.25 25.52,7.26 v30.76,12.51
EMG4_A  (via drill 0.38)
  Top 0.203: IN_CHOOSE4.2 64.64,19.22 IN_CHOOSE.2 63.16,19.86 57.41,14.12 v57.32,14.09 | v42.43,10.06 42.02,10.63 39.2,10.63 39.2,12.73 v38.94,13.23 | IC2.-IN2 33.76,13.06 v33.76,14.55
  Bottom 0.203: v33.76,14.55 38.57,14.55 38.95,14.17 v38.94,13.23 | v57.32,14.09 56.57,13.35 44.59,13.35 42.43,11.18 v42.43,10.06
EMG4_A1  (via drill 0.38)
  Top 0.203: IN_CHOOSE13.2 65.26,47.91 IN_CHOOSE8.2 63.78,48.55 58.03,42.81 v57.94,42.78 | v43.06,38.75 42.65,39.32 v39.83,39.32 39.83,41.42 v39.58,41.52 | IC4.-IN2 34.39,41.75 v34.39,43.24
  Bottom 0.203: v34.39,43.24 39.2,43.24 39.58,42.86 v39.58,41.52 | v57.94,42.78 57.2,42.03 45.22,42.03 43.06,39.87 v43.06,38.75
EMG4_IN  (via drill 0.38)
  Top 0.203: v69.43,20.02 v69.42,20.02 U$7.5 | v42.38,13.56 40.96,14.97 37.11,14.97 37.11,13.18 IC2.IN2
  Bottom 0.203: v42.38,13.56 42.47,13.64 42.59,13.64 43.05,14.1 44.99,14.1 45.97,15.08 57.35,15.08 58.01,15.1 62.97,20 v69.43,20.02
EMG4_IN1  (via drill 0.38)
  Top 0.203: IC4.IN2 38.12,42.24 v43.01,42.24 | v70.05,48.7 v70.05,48.71 U$19.5
  Bottom 0.203: v43.01,42.24 43.09,42.33 43.22,42.33 43.67,42.79 45.62,42.79 46.6,43.77 57.98,43.77 58.63,43.79 63.59,48.69 v70.05,48.7
EMG4_SEL
  Top 0.203: U$7.6 65.81,20.52 IN_CHOOSE.1
EMG4_SEL1
  Top 0.203: U$19.6 66.44,49.21 IN_CHOOSE8.1
EMG5  (via drill 0.38)
  Top 0.203: DC_OFFSET6.2 30.73,49.09 DC10.1 DC11.2 29.59,50.45 29.59,52.49 26.68,52.52 v26.7,52.17 26.68,44.49 U$21.1
EMG6  (via drill 0.38, 0.6)
  Top 0.203: v29.83,44.7 29.83,46.22 DC9.2 29.65,47.66 DC8.1 DC_OFFSET5.2 | U$21.2 22.02,43.61 v25.85,43.61
  Bottom 0.203: v25.85,43.61 28.75,43.61 v29.83,44.7
EMG7
  Top 0.203: DC_OFFSET7.2 31.33,38.22 30.32,38.22 30.32,38.24 DC12.1 30.22,36.65 DC13.2 29.18,35.55 26,35.55 21.52,40.02 U$21.3
EMG8  (via drill 0.6)
  Top 0.203: DC_OFFSET8.2 DC14.1 30.11,39.88 DC15.2 28.52,42.88 v28.52,44.56 | U$21.4 v21.02,45.72 v21.03,45.73
  Bottom 0.203: v21.03,45.73 27.35,45.73 v28.52,44.56
GND  (via drill 0.38, 0.38 pad 0.64)  (1 unrouted)
  Top 0.203: U$1.GND4 U$1.GND3 U$1.GND2 U$1.GND1 9.36,6.98 8.97,6.59 8.22,6.59 C_DCOUPL.2 C_391.2 7.25,6.54 6.23,5.52 R_LED.2 5.8,4.9 C_CHIP_RES.2 | C_32KHZ_2.2 6.11,8.94 U$17.2 3.85,8.94 3.85,12.86 3.4,13.3 v2.81,13.3 | 6.13,14.1 C_32KHZ_1.2 C_101.1 | C_272.1 C_271.1 | 12.41,8.88 U$1.GND009 U$1.GND005 U$1.GND001 U$1.GND002 U$1.GND006 U$1.GND010 U$1.GND011 U$1.GND007 U$1.GND003 U$1.GND004 U$1.GND008 U$1.GND012 U$1.GND016 U$1.GND015 U$1.GND014 U$1.GND013 | C_241.2 12.53,16.02 U$2.GND5 | INVERTED_F-ANTENNA.GND 19.5,19.39 v19.5,18.86 | C311.1 13.93,5.22 v14.17,4.98 | 18.88,12.82 C_TANT_1.2 | 18.88,14.01 C_211.2 19.38,14.01 C_32MHZ_1.2 | DC3.1 27.57,21.73 v27.57,22.9 | LV_SHORT.2 52.72,3.67 v52.72,5.42 | v55.18,8.55 55.11,8.55 C_NEG1.1 | U$10.2 19.58,10.4 v20.02,10.46 | C_TANT_3.1 27.51,7.12 DC5.1
  other vias: 2.08,17.99 8.23,19.16 4.11,19.09 5.1,19.12 2.13,19.04 10.13,19.08 7.22,19.13 12.95,19.07 6.95,2.57 7.95,2.57 9.94,2.57 8.95,2.57 13.42,16.02 13.41,17.02 14.51,16.98 15.6,16.95 9.18,19.08 3.1,19.11 19.89,15.55 10.9,2.59 23.89,11.89 29.67,14.44 31.48,13.51 2,2.55 3.06,2.53 4.11,2.53 1.91,3.68 1.91,4.86 2.1,9.67 6.15,19.19 2.06,17.07 3.08,18.02 7.89,18.08 10.02,18.05 8.69,16.06 3.84,16.07 8.92,18.1 9.65,17.14 11.03,19.03 9.69,16.11 2.88,16.04 11.98,19.07 2.08,8.76 2.12,7.93 26.33,24.36 27.39,24.38 29.7,24.38 28.53,24.39 30.82,24.36 67.39,2.68 66.38,2.69 70.49,2.8 63.25,4.64 27.68,16.54 50.71,24.34 31.45,7.71 69.45,2.77 70.7,13.7 68.39,2.74 7.64,16.04 6.7,16.07 5.69,16.07 4.72,16.07 8.65,17.07 1.97,16.04 3.03,17.01 19.91,16.54 20.02,17.68 19.02,17.66 18.03,17.68 17.11,17.66 16.07,17.75 70.57,3.77 70.54,4.83 65.36,2.74 64.27,2.7 63.33,2.7 62.29,2.7 62.45,17.51 63.33,3.61 64.16,3.64 65.32,3.64 66.33,3.6 67.3,3.64 68.28,3.64 69.32,3.75 69.32,4.76 70.76,12.76 70.72,14.7 70.76,11.76 70.55,8.67 70.86,22.01 70.84,21.04 70.82,19.97 70.82,18.96 55.69,19.34 55.62,20.77 57.7,17.06 58.77,18.26 59.7,19.44 56.97,20.25 31.85,24.39 32.92,24.41 33.95,24.41 35,24.44 36.15,24.44 37.01,24.41 26.28,23.36 26.28,22.35 26.28,21.42 38.06,24.46 39.27,24.46 40.44,24.44 41.45,24.44 42.43,24.46 43.32,24.46 44.33,24.46 45.37,24.46 46.35,24.46 47.48,24.42 48.54,24.44 49.65,24.42 51.78,24.36 52.67,24.36 53.74,24.38 54.76,24.4 55.72,24.38 56.78,24.4 57.91,24.38 58.93,24.38 60.14,24.42 61.17,24.4 62.17,24.45 63.19,24.45 64.15,24.42 65.09,24.42 66.11,24.4 67.18,24.4 68.18,24.4 69.12,24.4 70.86,24.42 70.81,22.96 70.81,17.92 70.69,15.7 70.83,5.77 61.35,2.66 60.45,2.66 41.2,2.65 42.12,2.64 43.11,2.64 44.01,2.63 45,2.64 45.92,2.65 47.15,2.66 48.06,2.66 48.91,2.7 49.89,2.64 50.71,2.63 51.53,2.6 52.46,2.62 53.33,2.64 54.24,2.63 55.15,2.63 56.09,2.64 56.98,2.63 57.85,2.63 58.71,2.66 59.58,2.63 40.27,2.63 39.38,2.64 38.46,2.66 37.47,2.64 36.49,2.67 35.52,2.64 34.53,2.64 33.54,2.64 32.51,2.66 31.38,2.66 30.41,2.68 29.41,2.68 28.34,2.63 27.42,2.62 26.42,2.62 24.64,2.67 23.68,2.62 22.71,2.62 21.76,2.64 20.89,2.61 19.94,2.62 18.96,2.64 18.07,2.62 2.05,11.53 2.03,15.01 2.12,7.04 70.59,7.7 70.62,9.59 26.2,20.53
  pour Top (isolate 0.381, no thermals): 13.93,18.21 14,19.61 1.56,19.61 1.54,2.11 25.67,2.11 25.67,13.03 9.68,13.16 9.69,15.88 12.18,15.9 13.9,15.9 13.9,13.26 25.12,13.26 25.12,18.21
  pour Bottom (no thermals): 1.5,19.61 1.54,2.11 25.67,2.11 25.67,19.38
  pour Bottom: 25.67,2.11 71.39,2.11 71.39,24.97 25.67,24.97
  pour Top: 71.39,2.11 71.39,24.97 25.67,24.97 25.67,2.11
GND1  (via drill 0.38)  (2 unrouted)
  Top 0.203: DC11.1 28.19,50.42 v28.19,51.59 | LV_SHORT1.2 53.34,32.36 v53.34,34.12 | v55.81,37.24 55.74,37.24 C_NEG3.1
  other vias: 25.25,38.7 22.03,38.62 31.77,43.66 30.82,52.4 31.99,52.52 33.47,52.52 31.36,51.24 32.9,51.27 68.02,31.37 67.01,31.38 71.12,31.49 32.44,42.57 39.86,38.24 31.25,45.05 32.83,44.93 32.07,36.4 70.07,31.46 71.28,42.83 69.01,31.43 71.19,32.46 71.16,33.52 65.98,31.43 64.9,31.39 63.96,31.39 62.91,31.39 63.08,46.2 63.96,32.3 64.79,32.33 65.94,32.33 66.95,32.29 67.93,32.33 68.9,32.33 69.95,32.44 69.95,33.45 71.32,41.88 71.25,43.83 71.32,40.83 71.18,37.36 71.38,51.05 71.38,49.95 71.38,48.74 71.38,47.46 56.31,48.03 56.24,49.46 58.32,45.75 59.4,46.95 60.33,48.13 57.59,48.94
  pour Top (isolate 0.381, no thermals): 14.62,48.3 2.19,48.3 2.16,30.8 26.29,30.8 26.29,41.72 26.25,48.26 25.83,48.07 25.78,48.07
  pour Bottom (no thermals): 2.13,48.3 2.16,30.8 26.29,30.8 26.29,48.07
  pour Bottom: 26.29,30.8 72.01,30.8 72.01,53.15 26.29,53.15
  pour Top: 72.01,30.8 72.01,53.15 26.29,53.15 26.29,30.8
LED/P1_5
  Top 0.203: U$1.P1_5 11.39,6.34 LED.1
N$1
  Top 0.203: C_ANT.2
  Top 0.254: U$2.UNBALANCED 10.88,17.31 11.52,17.95 14.55,17.95 15.28,18.67 15.28,19.01 | 15.28,19.01 R_ANT.2 | 15.28,19.01 C_ANT.2
N$2
  Top 0.203: INVERTED_F-ANTENNA.A
  Top 0.254: R_ANT.1 INVERTED_F-ANTENNA.A
N$3
  Top 0.203: C_NEG.2 U$4.2
N$4
  Top 0.203: C_NEG.1 U$4.4
N$5
  Top 0.203: U$4.6 57.65,3.67 LV_SHORT.1
N$6
  Top 0.203: IC1.RG1 34.9,16.43 GAIN1.2
N$7
  Top 0.203: IC1.RG1_1 35.55,16.43 GAIN1.1
N$8
  Top 0.203: IC1.RG2 34.9,23.23 GAIN2.2
N$9
  Top 0.203: IC1.RG2_1 35.55,23.23 GAIN2.1
N$10
  Top 0.203: GAIN3.2 35.06,6.55 IC2.RG1
N$11
  Top 0.203: GAIN3.1 35.71,6.55 IC2.RG1_1
N$12
  Top 0.203: 35.16,12.54 35.16,12.42 IC2.RG2 35.06,14.25 GAIN4.2
N$13
  Top 0.203: GAIN4.1 35.71,14.25 IC2.RG2_1
N$14
  Top 0.203: DC_OFFSET1.1 31.51,19.38 IC1.OUT1
N$15
  Top 0.203: DC_OFFSET2.1 31.45,20.03 IC1.OUT2
N$16
  Top 0.203: IC2.OUT2 31.95,10.7 DC_OFFSET4.1
N$17
  Top 0.203: IC2.OUT1 32,10.05 DC_OFFSET3.1
N$18
  Top 0.203: U$8.5 33.32,6.1 C_TANT_4.2
N$19
  Top 0.203: C_TANT_4.1 39.87,4.33 U$9.1
N$20
  Top 0.406: C_TANT_5.1 8.49,47.17 U$12.1 16.14,47.17 U$11.5
N$21
  Top 0.203: U$18.1 13.62,3.43 15.4,5.21 C_TANT_2.1 15.4,5.3 20.55,5.3 U$10.5
N$22
  Top 0.203: C_NEG2.2 U$13.2
N$23
  Top 0.203: C_NEG2.1 U$13.4
N$24
  Top 0.203: U$13.6 58.27,32.36 LV_SHORT1.1
N$25
  Top 0.203: IC3.RG1 35.52,45.12 GAIN5.2
N$26
  Top 0.203: IC3.RG1_1 36.17,45.12 GAIN5.1
N$27
  Top 0.203: IC3.RG2 35.52,51.92 GAIN6.2
N$28
  Top 0.203: U$7.1 67.01,18.02 IN_CHOOSE9.1
N$29
  Top 0.203: IC3.RG2_1 36.17,51.92 GAIN6.1
N$30
  Top 0.203: GAIN7.2 35.68,35.24 IC4.RG1
N$31
  Top 0.203: GAIN7.1 36.33,35.24 IC4.RG1_1
N$32
  Top 0.203: 35.79,41.23 35.79,41.11 IC4.RG2 35.68,42.94 GAIN8.2
N$33
  Top 0.203: GAIN8.1 36.33,42.94 IC4.RG2_1
N$34
  Top 0.203: 8.68,5.33 LED.2 8.77,5.33 R_LED.1
N$35
  Top 0.203: DC_OFFSET5.1 32.13,48.07 IC3.OUT1
N$36
  Top 0.203: DC_OFFSET6.1 32.08,48.72 IC3.OUT2
N$37
  Top 0.203: IC4.OUT2 32.57,39.38 DC_OFFSET8.1
N$38
  Top 0.203: IC4.OUT1 32.63,38.73 DC_OFFSET7.1
N$39
  Top 0.203: U$19.1 67.63,46.71 IN_CHOOSE17.1
N$40
  Top 0.406: C_TANT_6.2 8.46,43.26 C_TANT_5.2 8.49,43.22 10.34,43.22 10.34,44.35 U$11.2
NEG_STIM1  (via drill 0.38)
  Top 0.203: U$5.5 47.57,17.48 v47.53,17.48 | U$1.P0_6 14.73,8.9 15.58,8.9 v15.85,8.64
  Bottom 0.203: v47.53,17.48 41.75,17.48 41.75,4.91 19.7,4.91 v15.85,8.64
NEG_STIM2  (via drill 0.38)
  Top 0.203: U$5.14 45.03,20.02 45.01,20.02 45.01,20 v44.99,20 | U$1.P0_2 14.82,10.88 v17.71,10.88
  Bottom 0.203: v44.99,20 44.99,18.54 40.65,18.54 40.65,5.94 22.21,5.94 v17.71,10.88
NEG_STIM3  (via drill 0.38)
  Top 0.203: U$6.5 v47.63,5.86 v47.62,5.86 | U$1.P1_2 12.92,5.89 v12.52,5.32
  Bottom 0.203: v12.52,5.32 12.51,3.71 12.88,3.33 25.18,3.33 25.27,3.32 26.23,3.32 26.3,3.31 44.95,3.31 47.5,5.86 v47.62,5.86
NEG_STIM4  (via drill 0.38)
  Top 0.203: U$6.14 45.11,12.39 v44.74,11 | U$1.P1_1 13.43,5.22 v13.2,4.46
  Bottom 0.203: v44.74,11 44.74,4.84 43.59,3.7 14.37,3.74 v13.2,4.46
NEG_STIM5  (via drill 0.38)
  Top 0.203: U$14.14 45.66,48.71 45.64,48.71 45.64,48.69 v45.62,48.69 | U$20.7 7.12,34.38 v8.8,36.06
  Bottom 0.203: v45.62,48.69 45.62,47.23 41.27,47.23 41.27,35.39 40.51,34.63 22.84,34.63 22.84,34.61 13.41,34.61 13.41,35.35 12.65,36.11 8.8,36.11 v8.8,36.06
NEG_STIM6  (via drill 0.38)
  Top 0.203: U$14.5 48.2,46.17 v48.15,46.17 | U$20.9 8.82,33.37 v9.26,33.81
  Bottom 0.203: v48.15,46.17 42.38,46.17 42.38,34.36 41.61,33.6 9.47,33.6 v9.26,33.81
NEG_STIM7  (via drill 0.38)
  Top 0.203: U$15.14 45.73,41.08 v45.36,39.69 | v4.43,37.04 4.43,36.38 U$20.3
  Bottom 0.203: v45.36,39.69 45.36,33.15 44.6,32.39 15,32.43 5.19,32.43 4.43,33.2 v4.43,37.04
NEG_STIM8  (via drill 0.38)
  Top 0.203: U$15.5 48.25,34.55 v48.24,34.55 | v3.7,35.12 3.7,35.38 U$20.5
  Bottom 0.203: v48.24,34.55 48.24,32.7 47.48,31.93 26.86,31.93 25.89,31.93 25.73,31.92 4.46,31.92 3.7,32.68 v3.7,35.12
P2_1
  Top 0.203: U$1.P2_1 8.2,10.47 7.71,9.97 7.71,9 6.42,7.71 6.03,7.71 5.75,7.43 U$17.5
P2_2  (via drill 0.38 pad 0.64)
  Top 0.203: v7,9.29 7,9.85 8.13,10.98 U$1.P2_2 | v4.09,6.78 4.25,6.93 U$17.6
  Bottom 0.203: v4.09,6.78 4.49,6.78 v7,9.29
P2_3/X32K_Q2
  Top 0.203: U$1.P2_3/XOSC32K_Q2 7.92,11.48 7.2,10.76 32KHZ.Q2 | 32KHZ.Q2 | C_32KHZ_2.1 6.11,10.38 32KHZ.Q2
P2_4/X32K_Q1
  Top 0.203: U$1.P2_4/XOSC32K_Q1 6.86,11.99 32KHZ.Q1 6.13,12.36 C_32KHZ_1.1
POS_STIM1  (via drill 0.38)
  Top 0.203: U$5.15 43.76,19.96 v43.71,19.96 | U$1.P0_0 16.09,11.99 v16.85,12.38
  Bottom 0.203: v43.71,19.96 43.71,18.96 40.1,18.96 40.1,6.49 26.34,6.49 26.32,6.51 23.04,6.51 17.04,12.51 v16.85,12.38
POS_STIM2  (via drill 0.38)
  Top 0.203: U$5.6 48.76,15.98 v48.76,17.48 | 14.72,9.94 U$1.P0_4 16.39,9.96 v16.62,9.73
  Bottom 0.203: v48.76,17.48 48.76,18.14 41.21,18.14 41.21,5.4 21.09,5.4 v16.62,9.73
POS_STIM3  (via drill 0.38)
  Top 0.203: U$6.15 v43.82,10.98 | U$1.P1_0 14.7,7.94 14.77,7.94 16.53,6.15 v16.6,6.15
  Bottom 0.203: v43.82,10.98 43.82,5.35 42.68,4.21 18.57,4.21 v16.6,6.15
POS_STIM4  (via drill 0.38)
  Top 0.203: U$6.6 48.9,5.8 v48.85,5.8 | U$1.P1_3 12.41,6.3 v11.52,5.51 | v46.57,3.38 17.36,3.38 v16.66,2.68
  Bottom 0.203: v11.52,5.51 11.51,3.08 12.03,2.68 v16.66,2.68 16.83,2.68 | v48.85,5.8 48.85,5.67 v46.57,3.38
POS_STIM5  (via drill 0.38)
  Top 0.203: U$14.15 44.39,48.65 v44.34,48.65 | U$20.10 6.46,31.74 10.35,31.74 11.49,32.88 11.5,35.52 12.64,36.66 v17.82,36.66
  Bottom 0.203: v44.34,48.65 44.34,47.65 40.73,47.65 40.73,35.94 39.96,35.18 26.96,35.18 26.94,35.2 18.57,35.2 17.81,35.97 v17.82,36.66
POS_STIM6  (via drill 0.38)
  Top 0.203: U$15.15 v44.44,39.67 v44.45,39.67 | U$20.6 5.3,34.88 5.3,34.31 v5.28,34.29
  Bottom 0.203: v44.45,39.67 44.45,33.66 43.68,32.9 19.2,32.9 19.2,32.89 5.52,32.89 5.28,33.14 v5.28,34.29
POS_STIM7  (via drill 0.38)
  Top 0.203: U$14.6 49.39,44.67 v49.39,46.17 | U$20.8 6.46,33.9 7.41,33.9 8.81,35.3 9.82,35.3 v10.34,34.79
  Bottom 0.203: v49.39,46.17 49.39,46.83 41.83,46.83 41.83,34.85 41.07,34.09 11.67,34.09 10.97,34.79 v10.34,34.79 | v10.34,34.79
POS_STIM8  (via drill 0.38)
  Top 0.203: U$15.6 49.52,34.49 v49.48,34.49 | v2.79,35.87 6.46,35.87 U$20.4
  Bottom 0.203: v49.48,34.49 49.48,32.12 48.72,31.35 27.37,31.35 | 27.37,31.35 26.8,31.35 | 27.37,31.35 27.35,31.37 12.65,31.37 12.14,31.37 3.55,31.37 2.79,32.13 v2.79,35.87
RBIAS
  Top 0.203: U$1.RBIAS 8.34,13.26 R_BIAS.1
RESET  (via drill 0.38 pad 0.64)
  Top 0.203: 15.46,13.26 v15.56,13.26 14.79,12.5 U$1.RESET_N | v3.92,14.2 2.11,14.2 2.11,12.6 3.39,12.6 3.39,8.44 U$17.3
  Bottom 0.203: v15.56,13.26 15.56,13.58 15.47,13.67 4.44,13.67 3.92,14.19 v3.92,14.2
RF_N
  Top 0.203: U$2.BALANCED3
  Top 0.254: U$1.RF_N 11.39,13.93 10.88,14.44 U$2.BALANCED3
RF_P
  Top 0.203: U$2.BALANCED4
  Top 0.254: U$1.RF_P 11.9,13.9 12.44,14.43 U$2.BALANCED4
STIM1  (via drill 0.38)
  Top 0.203: U$5.2 U$5.3 45.03,14.09 v46.12,14.1 | v55.12,14 56.1,14 57.4,12.7 69.15,12.7 69.15,7.87 U$28.1
  Bottom 0.203: v46.12,14.1 55.07,14.06 v55.12,14
STIM2  (via drill 0.38)
  Top 0.203: U$5.12 U$5.11 48.85,21.18 v48.84,19.99 | v53.34,19.53 54.01,19.53 54.01,12.06 63.42,12.06 v63.4,12.05 | v63.42,7.65 64.13,8.36 U$28.2
  Bottom 0.203: v48.84,19.99 53.33,19.99 v53.34,19.53 | v63.4,12.05 63.42,11.24 v63.42,7.65
STIM3  (via drill 0.38)
  Top 0.203: U$6.2 U$6.3 45.71,6.57 45.71,5.82 46.52,5.82 47.31,5.03 49.26,5.03 v50.12,5.89 | v59.44,9.8 65.48,9.78 66.44,8.82 67.63,8.82 U$28.3
  Bottom 0.203: v50.12,5.89 50.39,5.89 53.75,9.25 58.64,9.25 v59.44,9.8
STIM4
  Top 0.203: U$6.12 U$6.11 48.86,12.43 48.86,14.4 53.19,14.4 53.17,11.38 67.64,11.38 U$28.4
STIM5  (via drill 0.38)
  Top 0.203: U$14.12 U$14.11 v49.47,48.68 | v53.97,48.22 54.63,48.22 54.63,41.51 55.39,40.75 64.04,40.75 v64.02,40.74 | v64.04,37.04 64.75,37.05 U$16.2
  Bottom 0.203: v49.47,48.68 53.96,48.68 v53.97,48.22 | v64.02,40.74 64.04,39.93 v64.04,37.04
STIM6  (via drill 0.38)
  Top 0.203: U$14.2 U$14.3 45.66,42.78 v46.75,42.79 | v55.75,42.69 56.72,42.69 58.02,41.39 69.01,41.39 69.77,40.63 69.77,36.56 U$16.1
  Bottom 0.203: v46.75,42.79 55.69,42.75 v55.75,42.69
STIM7
  Top 0.203: U$15.12 U$15.11 49.48,41.12 49.48,42.33 50.25,43.09 53.05,43.09 53.81,42.33 53.8,40.84 54.56,40.07 67.51,40.07 68.28,39.32 U$16.4
STIM8  (via drill 0.38)
  Top 0.203: U$15.2 U$15.3 46.33,35.26 46.33,34.13 47.09,33.37 49.54,33.37 v50.74,34.58 | v60.27,38.49 66.11,38.47 67.06,37.51 68.25,37.51 U$16.3
  Bottom 0.203: v50.74,34.58 51.02,34.58 54.38,37.94 59.26,37.94 v60.27,38.49
SWITCH_OUT
  Top 0.203: 5.44,3.39 U$18.2 5.48,3.59 FILTER_CHIP.1
V+
  Top 0.203: C_TANT_1.1 20.6,11.76 | 20.6,11.76 V+_IN.4 V+_IN.3 | V+_IN.3 V+_IN.2 V+_IN.1 21.45,10.03 | V+_IN.3 21.45,11 WIRE+.1 24.96,11 25.74,10.22 25.74,7.66 26.13,7.66 26.13,5.95 C_TANT_3.2 27.89,4.2 U$8.3 29.91,4.2 30.2,4.49 30.2,5.7 29.85,6.05 29.22,6.05 U$8.1 | U$10.1 20.79,9.78 20.79,11.12 20.6,10.96 20.6,11.48 | 20.6,11.76 20.6,11.48 | U$10.3 18.63,10.1 19.93,11.4 20.52,11.4 20.6,11.48
V+1  (via drill 0.6)
  Top 0.406: U$11.1 12.21,45.29 v12.21,45.61 | WIRE+1.1 3.29,39.99 C_TANT_6.1 8.46,40.09 v11.56,40.09 11.56,43.4 U$11.3
  Bottom 0.406: v12.21,45.61 11.56,45.61 v11.56,40.09
VDD  (via drill 0.38 pad 0.64)
  Top 0.203: U$1.AVDD2 U$1.AVDD1 U$1.AVDD4 9.87,13.87 C_271.2 C_272.2 8.38,14.21 v8.08,14.51 | C311.2 | U$1.AVDD3 12.41,13.8 14.13,15.53 C_241.1 14.71,15.53 v14.93,15.75 | U$1.AVDD5 13.93,13.59 14.35,14.01 17.69,14.01 | U$1.AVDD6 8.07,12.5 v7.64,12.94 7.13,13.45 C_101.2 | v6.3,6.9 5.41,6 4.38,6 3.83,5.45 C_CHIP_RES.1 2.86,3.93 FILTER_CHIP.2 | C311.2 U$1.DVDD2 | 17.69,14.01 v17.69,13.24 | 17.69,14.01 C_211.1 | U$17.1 5.15,10.18 v5.21,10.24 | C311.2 14.68,6.22 v14.89,6.44 | C_391.1 7.25,7.46 7.06,7.65 v6.3,6.9 | v6.3,6.9 v6.3,6.91 7.82,8.43 8.59,8.43 U$1.DVDD1
  Bottom 0.203: v6.3,6.9 8.07,8.67 8.07,10.24 | 8.07,10.24 8.07,12.5 v7.64,12.94 | v7.64,12.94 7.93,13.23 14.84,13.23 14.84,11.57 | v8.08,14.51 7.68,14.91 3.01,14.91 3.01,14.11 3.97,13.15 7.43,13.15 v7.64,12.94 | 7.43,13.14 v7.64,12.94 | 16.7,13.42 16.7,13.98 v14.93,15.75 | 16.7,13.42 14.84,11.57 | 16.7,13.42 17.69,13.42 v17.69,13.24 17.69,13.12 | v5.21,10.24 8.07,10.24 | 14.84,11.57 14.84,6.49 v14.89,6.44
VDD1  (via drill 0.38, 0.6)
  Top 0.203: DC8.2 DC10.2 28.32,48.41 v27.33,48.38 27.35,38.24 DC12.2 DC14.2 | IC3.VS_B 38.95,47.42 v38.94,48.35 38.94,44.64 U$14.1 | v33.07,46.6 33.07,47.42 IC3.VS | IC4.VS_B 37.96,38.1 38.89,38.1 v38.89,37.33 | v33.52,37.16 33.52,38.09 IC4.VS | v38.89,37.33 38.89,35.88 38.81,35.88 38.81,32.26 39.57,31.49 58.81,31.49 59.57,32.26 U$13.8 | U$14.1 43.17,44.67 | U$14.16 43.08,49.87 | 43.12,37.48 U$15.1 | U$15.10 50.79,39.45 v50.74,39.45 50.69,39.5 v48.26,39.5 | U$14.1 U$14.16 | U$14.10 50.74,50.94 v50.71,51.64 | v43.13,51.69 43.13,49.87 U$14.16 | 43.12,41.08 U$15.16 | v38.89,37.33 38.84,37.48 43.12,37.48 | U$14.1 43.12,44.58 44.19,43.51 44.19,42.09 U$15.16 | 43.12,37.48 43.61,37.25 | 43.61,37.25 44.74,37.25 v46.29,38.8 | U$15.16 43.17,40.17 43.7,39.65 43.7,37.33 43.61,37.25
  Top 0.406: FILTER_CHIP1.1 4.33,44.79 U$12.2 v2.91,47.17 v2.91,47.18
  Bottom 0.203: v38.94,48.35 33.07,48.38 v33.07,46.6 27.33,46.57 27.33,47.15 | v27.33,48.38 27.33,47.15 | v38.89,37.33 33.52,37.33 v33.52,37.16 | v50.71,51.64 50.71,51.69 v43.13,51.69 | v46.29,38.8 47.56,38.8 v48.26,39.5 | 27.33,47.15 2.91,47.15 v2.91,47.17
VDD2  (via drill 0.38)
  Top 0.203: DC1.2 DC.2 26.66,17.95 v26.66,15.9 26.66,10.71 27.82,9.55 DC4.2 DC6.2 | IC1.VS 33.27,18.42 v32.48,17.62 | IC1.VS_B 37.99,18.73 v38.17,18.55 38.19,18.58 38.19,19.3 41.12,22.22 41.36,22.22 42.4,21.18 U$5.16 | 37.93,9.48 38.05,9.48 38.64,10.07 38.64,12.27 37.95,12.96 37.95,13.55 38.47,14.07 39.78,14.07 40.14,13.71 U$9.2 42.4,12.54 U$6.16 42.55,11.19 43.33,10.41 43.33,9.71 | 37.93,9.48 37.41,9.48 IC2.VS_B | IC2.VS 33.43,9.32 v32.14,8.39 | 37.93,9.48 38.11,9.29 v38.11,8.68 42.13,8.68 42.6,8.21 42.6,7.25 U$6.1 | 43.33,9.71 43.33,8.91 42.59,8.17 42.59,7.03 42.55,6.98 42.55,6.86 | U$6.10 50.17,11.11 v49.48,10.41 | v45.56,9.73 43.35,9.73 43.33,9.71 | U$5.16 42.49,22.09 v43.09,22.68 | v49.8,22.81 49.8,21.49 U$5.10 | U$4.8 58.95,5.31 v60.23,6.59 | U$5.1 U$5.16
  Bottom 0.203: v32.48,17.62 32.48,16.8 30.95,15.27 27.3,15.27 v26.66,15.9 | v38.17,18.55 33.41,18.55 v32.48,17.62 | 33.37,8.48 33.49,8.61 | 33.49,8.61 34.38,9.49 37.3,9.49 v38.11,8.68 | v45.56,9.73 46.25,10.41 v49.48,10.41 49.87,10.81 59.93,10.81 60.23,10.52 v60.23,6.59 | v43.09,22.68 49.67,22.68 v49.8,22.81 | v32.48,17.62 32.19,17.63 v32.14,8.39 33.49,8.61
VEE  (via drill 0.38)
  Top 0.203: IC1.-VS 32.46,20.68 v32.46,21.22 | IC1.-VS_B 38.27,20.68 v38.27,21.02 39.22,21.02 39.22,23.74 46.3,23.74 U$5.13 46.3,19.27 | IC2.-VS_B 37.93,11.35 v37.93,12.06 | v32.9,12.27 32.9,11.35 IC2.-VS | U$5.9 51.38,19.27 46.3,19.27 | U$6.4 46.36,9.62 | 46.36,9.62 U$6.13 46.3,12.45 47.07,13.21 47.07,14.78 46.3,15.54 U$5.4 46.3,19.27 | U$6.9 51.44,10.12 | 51.44,10.12 51.44,9.62 46.36,9.62 | U$4.5 56.07,4.96 C_NEG1.2 54.34,5.91 52.52,7.73 52.52,9.04 51.44,10.12
  Bottom 0.203: v32.46,21.22 38.27,21.22 v38.27,21.02 39.63,21.02 39.63,12.06 v37.93,12.06 32.9,12.06 v32.9,12.27
VEE1  (via drill 0.38)
  Top 0.203: IC3.-VS 33.08,49.37 v33.08,49.91 | IC3.-VS_B 38.9,49.37 v38.9,49.71 39.84,49.71 39.84,52.43 46.93,52.43 U$14.13 46.93,47.96 | IC4.-VS_B 38.55,40.03 v38.55,40.75 | v33.52,40.95 33.52,40.03 IC4.-VS | U$14.9 52.01,47.96 46.93,47.96 | U$15.4 46.98,38.54 | 46.98,38.54 U$15.13 46.93,41.14 47.69,41.9 47.69,43.46 46.93,44.23 U$14.4 46.93,47.96 | U$15.9 52.06,38.81 | 52.06,38.81 52.06,38.54 46.98,38.54 | U$13.5 56.69,33.65 C_NEG3.2 54.97,34.6 53.14,36.42 53.14,37.73 52.06,38.81
  Bottom 0.203: v33.08,49.91 38.9,49.91 v38.9,49.71 40.26,49.71 40.26,40.75 v38.55,40.75 33.52,40.75 v33.52,40.95
X32M_Q1
  Top 0.203: U$1.XOSC_Q1 13.43,13.66 14.25,14.48 C_32MHZ_1.1 18.89,16.48 U$3.Q1
X32M_Q2
  Top 0.203: U$1.XOSC_Q2 12.92,13.72 14.19,14.99 16.12,14.99 C_32MHZ_2.1 U$3.Q2

## Text on the board
tValues: EMG1 | EMG2 | Voltage Stimulation / EMG recording board / Kevin Keller Dec 2015 / iBionics Lab | AD8222 | Stim Switch | EMG4 | EMG3 | DC Offset / V divider | EMG / Output | EMG Electrode Input / Select input with 0 ohm | DC Offset / V divider | Stim Switch | AD8222 | Stim4 | Stim3 | Stimulation / Control | Stim2 | Stim1 | V Inverter | Gain1 | EMG1 | Zigbee + EMG + Stimulation / Kevin Keller / iBionics Lab NCSU Dec 2015 | Stim2 | EMG1 | AD8222 | EMG2 | EMG4 | Stim Switch | EMG3 | Balun | EMG2 | DC Offset / V divider | Gain2 | Stim1 | EMG electrode Inputs / 0 resistors needed to / select either ground / or electrode | DC Offset / V divider | EMG4 | Gain4 | Stim4 | AD8222 | Stim4 | Stim Switch | Stim3 | Stim2 | EMG3 | V inverter | Stim1 | Gain3 | Stim3 | Stimulation Outputs